# Altium PCB Adafruit DRV8833.PcbDoc
Units mil, origin at the board's own origin, x right, y up, seen from the top; angles counter-clockwise.
Board outline 700 x 1000 mil, 2 copper layers (Top, Bottom); 22 components, 17 nets, 56 pads, 13 vias.
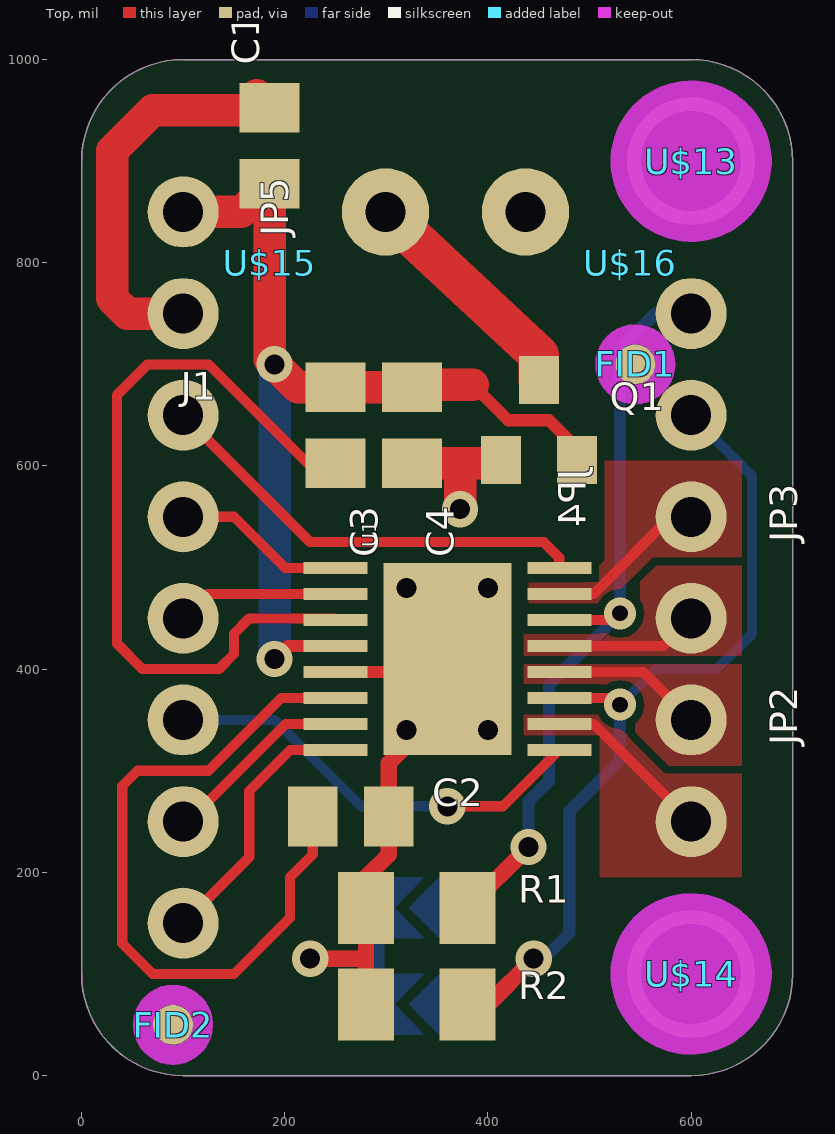
[diagram p0: Top view]
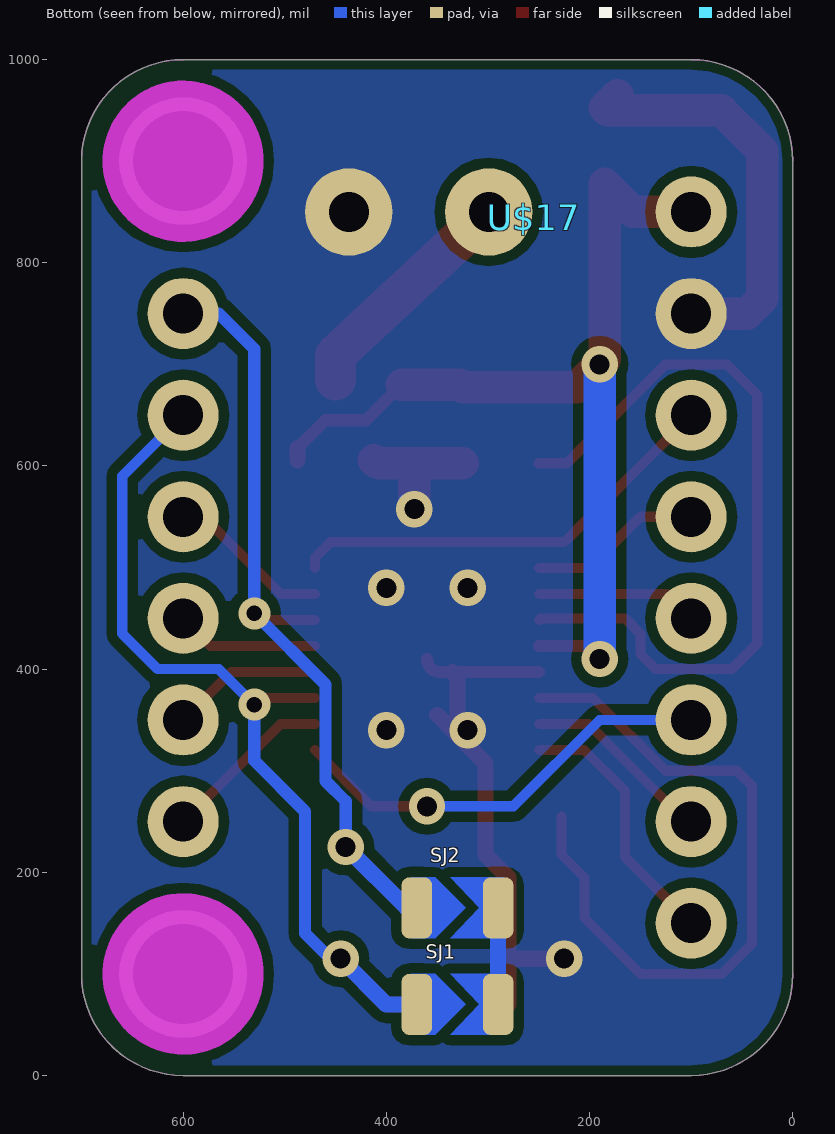
[diagram p1: Bottom view, seen from below]

## Layer stack, top to bottom
Top Solder: solder mask 0.4, Solder Resist, Dk 3.5
Top: signal copper 1.378
Dielectric 1: dielectric 12.6, FR-4, Dk 4.8
Bottom: signal copper 1.378
Bottom Solder: solder mask 0.4, Solder Resist, Dk 3.5

## Board outline
0,900 cw(c100,900) 100,1000 600,1000 cw(c600,900) 700,900 700,100 cw(c600,100) 600,0 100,0 cw(c100,100) 0,100

## Design rules (kind name [scope] priority, off if disabled: settings)
BoardOutlineClearance mdCopperDimension [All] p1: gap=10 ignorepadtopadclearanceinfootprint=FALSE except(0: Arc-SplitContinuation Track-SplitContinuation SMDPad-SplitContinuation THPad-SplitContinuation Via-SplitContinuation Fill-SplitContinuation Poly-SplitContinuation Region-SplitContinuation Text-SplitContinuation)
Clearance Clearance_for_PolygonClass_Isolate_10 [InPolygonClass('Isolate_10') vs IsArc Or IsTrack Or IsPad Or IsVia Or IsFill Or IsRegion Or IsText] p1: gap=10 ignorepadtopadclearanceinfootprint=FALSE
Clearance "Clearance (Same Net)" [All] p2: gap=8 ignorepadtopadclearanceinfootprint=FALSE
Clearance [All] p3: gap=8 ignorepadtopadclearanceinfootprint=FALSE
HoleSize [All] p1: absolutevalues=TRUE maxlimit=100000 minlimit=15.5 maxpercent=80.000 minpercent=20.000
HoleToHoleClearance mdDrill [All] p1: gap=8 allowstackedmicrovias=TRUE
MinimumSolderMaskSliver [All] p1 off: minsoldermaskwidth=10
PasteMaskExpansion Expansion_SMDPaste_OFF [InPadClass('SMDPaste_OFF')] p1: expansion=0
PasteMaskExpansion mlMinCreamFrame [All] p2: expansion=0
PolygonConnect PolygonConnect_For_PolygonThermal_OFF [InPolygonClass('PolygonThermal_OFF')] p1: connectstyle=Direct reliefconductorwidth=10 reliefentries=4 polygonreliefangle="90 Angle" airgapwidth=10
PolygonConnect PolygonConnect_For_PolygonThermal_ON_Width120000_Gap100000 [InPolygonClass('PolygonThermal_ON_Width120000_Gap100000') vs Not IsVia] p2: connectstyle=Relief reliefconductorwidth=12 reliefentries=4 polygonreliefangle="90 Angle" airgapwidth=10
PolygonConnect ThermalVias [IsVia] p3: connectstyle=Direct reliefconductorwidth=10 reliefentries=4 polygonreliefangle="90 Angle" airgapwidth=10
PolygonConnect [All] p4: connectstyle=Relief reliefconductorwidth=10 reliefentries=4 polygonreliefangle="90 Angle" airgapwidth=10
RoutingVias [All] p1: holewidth=15.5 width=31.5 viastyle="Through Hole" minholewidth=15.5 minwidth=31.5 maxholewidth=100 maxwidth=100
SolderMaskExpansion Expansion_SMDSolder_OFF [InPadClass('SMDSolder_OFF')] p1: expansion=0 istentingtop=FALSE
SolderMaskExpansion mlMinStopFrame [All] p2: expansion=2 istentingtop=FALSE
Width [All] p1: maxlimit=10 minlimit=8 preferedwidth=8
26 further rules are at their usual default settings.

## Classes and differential pairs
polygon class PolygonThermal_OFF: Polygon_1_Net_AOUT1 Polygon_1_Net_AOUT2 Polygon_1_Net_BOUT1 Polygon_1_Net_BOUT2
polygon class PolygonThermal_ON_Width120000_Gap100000: Polygon_1_Net_GND
polygon class Isolate_10: Polygon_1_Net_GND
pad class SMDSolder_OFF: SJ1-1 SJ1-2 SJ2-1 SJ2-2
pad class SMDPaste_OFF: FID1-1 FID2-1 SJ1-1 SJ1-2 SJ2-1 SJ2-2 U1-PPAD

## Components (designator, comment, footprint, x,y, rotation, side; value= is the part's Value field where it differs from the comment)
C1 "10µF/16V" 0805-NO 185,915 r90 top
C2 "10µF" 0805-NO 265,255 r0 top
C3 "0.1uF" 0805-NO 250,640 r270 top
C4 "10µF/16V" 0805-NO 325,640 r270 top
FID1 "" FIDUCIAL_1MM 545,700 r0 top
FID2 "" FIDUCIAL_1MM 90,50 r0 top
J1 "" TERMBLOCK_1X2-3.5MM 370,850 r180 top
JP2 "" 1X02_ROUND 600,300 r270 top
JP3 "" 1X02_ROUND 600,500 r270 top
JP4 "" 1X02_ROUND 600,700 r90 top
JP5 "" 1X08_ROUND_70 100,500 r270 top
Q1 "DMG3415U" SOT23-WIDE 450,645 r0 top
R1 "0.2Ω" _1206 330,165 r0 top
R2 "0.2Ω" _1206 330,70 r0 top
SJ1 "ISENSEA" SOLDERJUMPER_ARROW_NOPASTE 330,70 r180 bottom
SJ2 "ISENSEB" SOLDERJUMPER_ARROW_NOPASTE 330,165 r180 bottom
U1 "DRV8833PWPR" HTSSOP16 360,410 r90 top
U$13 "" MOUNTINGHOLE_2.5_PLATED 600,900 r0 top
U$14 "" MOUNTINGHOLE_2.5_PLATED 600,100 r0 top
U$15 "" SYMBOL_PLUS 185,800 r0 top
U$16 "" SYMBOL_MINUS 540,800 r0 top
U$17 "" ADAFRUIT_3.5MM 255,845 r180 bottom

## Footprints (in the part's own frame and the unit in brackets; to place one, negate y for a bottom-side part, rotate by r counter-clockwise, add the part's x,y. Pads: shape width x height; smd on the part's side, far side on the other; paste and mask are expansions set on the pad)
1X02_ROUND [mil] "1X02_ROUND"
  round 70 hole 39.37: 1(-50,0) 2(50,0)
  body extent -104,-35 85,35, height 150
1X08_ROUND_70 [mil] "1X08_ROUND_70"
  round 70 hole 39.37: 1(-350,0) 2(-250,0) 3(-150,0) 4(-50,0) 5(50,0) 6(150,0) 7(250,0) 8(350,0)
  body extent -404,-35 385,35, height 150
0805-NO [mil] "0805-NO"
  rect 48.82x59.06 smd: 1(-37.4,0) 2(37.4,0)
  body extent -62,-30 62,30, height 150
_1206 [mil] "_1206"
  rect 55.12x70.87 smd: 1(-50,0) 2(50,0)
  body extent -78,-35 78,35, height 150
ADAFRUIT_3.5MM [mil] "ADAFRUIT_3.5MM"
FIDUCIAL_1MM [mm] "FIDUCIAL_1MM"
  rrect100% 1x1 smd paste+0: 1(0,0)
  Top keep-out lines w0.5: -0.75,0 ccw(c0,0) 0,-0.75 ; -0.75,0 cw(c0,0) 0,0.75 ; -0.75,0 ccw(c0,0) 0,-0.75 ; -0.75,0 cw(c0,0) 0,0.75 ; 0,-0.75 ccw(c0,0) 0.75,0 ; 0,-0.75 ccw(c0,0) 0.75,0 ; 0,0.75 cw(c0,0) 0.75,0 ; 0,0.75 cw(c0,0) 0.75,0
  body extent -1.01,-1.01 1.01,1.01, height 3.81
HTSSOP16 [mil] "HTSSOP16"
  rect 11.81x62.99 smd: 1(-89.57,-110.24) 2(-63.98,-110.24) 3(-38.39,-110.24) 4(-12.8,-110.24) 5(12.8,-110.24) 6(38.39,-110.24) 7(63.98,-110.24) 8(89.57,-110.24) 9(89.57,110.24) 10(63.98,110.24) 11(38.39,110.24) 12(12.8,110.24) 13(-12.8,110.24) 14(-38.39,110.24) 15(-63.98,110.24) 16(-89.57,110.24)
  rect 188.98x125.98 smd paste+0: PPAD(0,0)
  body extent -103,-142 103,142, height 150
MOUNTINGHOLE_2.5_PLATED [mil] "MOUNTINGHOLE_2.5_PLATED"
  round 125.98 hole 98.43: P$1(0,0)
  Top keep-out circle w80: c0,0 r39.37
  Top keep-out circle w80: c0,0 r39.37
  Bottom keep-out circle w80: c0,0 r39.37
  Bottom keep-out circle w80: c0,0 r39.37
  body extent -80,-80 80,80, height 150
SOLDERJUMPER_ARROW_NOPASTE [mil] "SOLDERJUMPER_ARROW_NOPASTE"
  rrect50% 30x60 smd paste+0 mask+0: 1(-40,0) 2(40,0)
  Top region: -7.36,30 21.61,0 -7.36,-30 46,-30 46,30
  Top region: -46,30 -22.09,30 7.91,0 -22.09,-30 -46,-30
  body extent -58,-33 58,33, height 150
SOT23-WIDE [mm] "SOT23-WIDE"
  rect 1x1.2 smd: 1(-0.95,-1) 2(0.95,-1) 3(0,1)
  body extent -1.68,-1.6 1.68,1.6, height 3.81
SYMBOL_MINUS [mil] "SYMBOL_MINUS"
SYMBOL_PLUS [mil] "SYMBOL_PLUS"
TERMBLOCK_1X2-3.5MM [mil] "TERMBLOCK_1X2-3.5MM"
  round 86 hole 39.37: 1(70.87,0) 2(-66.93,0)
  body extent -110,-43 114,43, height 50

## Part data
C1 C2 C3 C4: library part 0805-NO, PackageName=0805-NO
FID1 FID2: library part FIDUCIAL_1MM, PackageName=FIDUCIAL_1MM
J1: library part TERMBLOCK_1X2-3.5MM, PackageName=TERMBLOCK_1X2-3.5MM
JP2 JP3 JP4: library part 1X02_ROUND, PackageName=1X02_ROUND
JP5: library part 1X08_ROUND_70, PackageName=1X08_ROUND_70
Q1: library part SOT23-WIDE, PackageName=SOT23-WIDE
R1 R2: library part _1206, PackageName=_1206
SJ1 SJ2: library part SOLDERJUMPER_ARROW_NOPASTE, PackageName=SOLDERJUMPER_ARROW_NOPASTE
U1: library part HTSSOP16, PackageName=HTSSOP16
U$13 U$14: library part MOUNTINGHOLE_2.5_PLATED, PackageName=MOUNTINGHOLE_2.5_PLATED
U$15: library part SYMBOL_PLUS, PackageName=SYMBOL_PLUS
U$16: library part SYMBOL_MINUS, PackageName=SYMBOL_MINUS
U$17: library part ADAFRUIT_3.5MM, PackageName=ADAFRUIT_3.5MM

## Via types
v1: diameter 35.69/35.69 (per signal layer), hole 19.69, Top to Bottom, 11 vias
v2: diameter 31.5/31.5 (per signal layer), hole 15.5, Top to Bottom, 2 vias

## Nets (pads, with @x,y where several pads share a name; then routed paths per layer and width w, separated by ;. In a path a pad name is that pad's centre, name@x,y a point inside that pad or via, vN(x,y) a via of type N, cw(c..) or ccw(c..) an arc to the next point about the centre after c; other vN are vias at no path point)
!SLEEP: JP5.6 U1.1 | length 428.4
  Top w10: v1(360,265) 414.8,265 U1.1
  Bottom w10: JP5.6 190,350 275,265 v1(360,265)
AIN1: JP5.8 U1.16 | length 258.4
  Top w10: JP5.8 165,215 165,280 205.43,320.43 U1.16
AIN2: JP5.7 U1.15 | length 189.5
  Top w10: JP5.7 105,250 201.02,346.02 U1.15
AOUT1: JP2.2 U1.2 | length 169.5
  Top w10: U1.2 503.98,346.02 JP2.2
AOUT2: JP2.1 U1.4 | length 149.3
  Top w10: U1.4 552.8,397.2 JP2.1
ASEN: JP4.1 R2.2 SJ1.1 U1.3 | length 929.7
  Top w10: U1.3 523.39,371.61 v2(530,365)
  Top w16: R2.2 400,70 v1(445,115)
  Bottom w10: v1(445,115) v1@455,115 ; v2(530,365) 565,400 625,400 660,435 660,590 JP4.1
  Bottom w12: v1@455,115 480,140 480,260 530,310 v2(530,365)
  Bottom w16: SJ1.1 400,70 v1(445,115)
BIN1: JP5.4 U1.9 | length 170.6
  Top w10: JP5.4 150,550 200.43,499.57 U1.9
BIN2: JP5.5 U1.10 | length 159.7
  Top w10: JP5.5 123.98,473.98 U1.10
BOUT1: JP3.1 U1.7 | length 161.2
  Top w10: U1.7 503.98,473.98 580,550 JP3.1
BOUT2: JP3.2 U1.5 | length 141
  Top w10: U1.5 572.8,422.8 JP3.2
BSEN: JP4.2 R1.2 SJ2.1 U1.6 | length 854
  Top w10: U1.6 523.39,448.39 v2(530,455)
  Top w16: R1.2 v1(440,225)
  Bottom w12: v1(440,225) 440,270 460,290 460,385 v2(530,455) 530,715 565,750 JP4.2
  Bottom w16: SJ2.1 380,165 v1(440,225)
GND: C1.2 C2.2 C4.2 J1.2 JP5.2 Q1.1 R1.1 R2.1 SJ1.2 SJ2.2 U1.13 U1.PPAD | length 1246.5
  Top w12: U1.13 335,397.2 347.2,397.2 ccw(c347.2,410) U1.PPAD
  Top w16: v1(225,115) 280,115 R2.1 R1.1 280,195 302.4,217.4 C2.2 302.4,307.4 U1.PPAD@330,335 ; U1.PPAD@335,397.2 330,392.2 U1.PPAD@330,335 ; U1.PPAD@350,355 U1.PPAD@330,335
  Top w32: JP5.2 45,750 30,765 30,910 70,950 182.6,950 C1.2 C1.2@172.4,965 ; C4.2 372.5,602.6 ; v1(372.5,557.5) 372.5,602.6 ; Q1.1 cw(c405.28,612.95) 405.28,602.6 372.5,602.6
  Bottom w16: SJ1.2 SJ2.2 ; v1(372.5,557.5) v1@380,565
  other v1: 320,340 400,340 320,480 400,480
N$8: C3.2 U1.11 | length 771
  Top w10: U1.11 248.15,450 165,450 150,435 150,415 135,400 60,400 35,425 35,670 65,700 125,700 222.4,602.6 C3.2
NFAULT: JP5.3 U1.8 | length 438.5
  Top w10: JP5.3 225,525 455,525 470.24,509.76 U1.8
PWRIN: J1.1 Q1.3 | length 231.2
  Top w40: J1.1 450,709.13 Q1.3
VINT: C2.1 U1.14 | length 710.2
  Top w10: C2.1 227.6,217.6 205,195 205,155 150,100 70,100 40,130 40,285 55,300 125,300 196.61,371.61 U1.14
VMOTOR: C1.1 C3.1 C4.1 JP5.1 Q1.2 U1.12 | length 976.8
  Top w12: v1(190,410) 202.8,422.8 U1.12 ; 385,680 420,645 460,645 Q1.2@487.4,617.6
  Top w16: Q1.2 Q1.2@487.4,617.6
  Top w32: JP5.1 157.4,850 C1.1 185,705 v1(190,700) 212.6,677.4 C3.1 C4.1 327.6,680 385,680
  Bottom w32: v1(190,410) v1(190,700)
pads on no net: FID1.1 FID2.1 U$13.P$1 U$14.P$1

## Polygon pours and split planes (outlines as drawn)
GND on Bottom "Polygon_1_Net_GND" (solid, remove dead copper, pour order 2): -6,-6 -6,1006 706,1006 706,-6
BOUT1 on Top "Polygon_1_Net_BOUT1" (solid, remove dead copper, pour order 1): 440,465 517.07,465 562.07,510 650,510 650,605 515,605 515,507.07 492.93,485 440,485
BOUT2 on Top "Polygon_1_Net_BOUT2" (solid, remove dead copper, pour order 3): 435,410 650,410 650,505 567.93,505 550,487.07 550,447.07 542.93,440 435,440
AOUT2 on Top "Polygon_1_Net_AOUT2" (solid, remove dead copper, pour order 0): 435,405 650,405 650,305 577.93,305 545,337.93 545,382.93 542.93,385 435,385
AOUT1 on Top "Polygon_1_Net_AOUT1" (solid, remove dead copper, pour order 4): 435,355 435,335 510,335 510,195 650,195 650,305 576.7,305 511.7,355

## Keep-outs
Keep-Out Layer:
  the board outline again, w0

## Silkscreen, mask and mechanical layers (free items; w line width, h text height)
Dimension:
  the board outline again, w0
tPlace:
  text "VMotor" at 293.73,951.01 h34
  text "VM" at 83.35,906.01 h34
  text "BS" at 685,720 h34 r90
  text "GND" at 45,700 h34 r90
  text "AS" at 685,620 h34 r90
  text "FLT" at 185,600 h34 r90
  text "1" at 555,575 h34 r90
  text "DRV8833" at 195,525 h42.5
  text "BIN1" at 55,495 h34 r90
  text "2" at 555,475 h34 r90
  text "BOUT" at 690,420 h42.5 r90
  text "BIN2" at 185,390 h34 r90
  text "2" at 555,375 h34 r90
  text "SLP" at 55,300 h34 r90
  text "1" at 555,275 h34 r90
  text "AOUT" at 695,205 h42.5 r90
  text "AIN2" at 195,200 h34 r90
  text "B" at 430,145 h34
  text "AIN1" at 50,100 h34 r90
  text "A" at 430,50 h34
bPlace:
  text "AOUT/BOUT:" at 500.31,289.32 h42.5 r270
  text "2.8 - 10V DC" at 232.21,285.19 h42.5 r270
  text "PWRIN/VMOTOR:" at 157.21,271.03 h42.5 r270
  text "1.2A cont. each" at 425.31,186.65 h42.5 r270
  text "BSn" at 255,145 h34
  text "ASen" at 255,55 h34

## Dimensions
600,100 to 600,900 on tFinish
395,0 to 435,1000 on tFinish
460,0 to 100,500 on tFinish
0,880 to 600,900 on tFinish
0,850 to 700,780 on tFinish
100,500 to 600,500 on tFinish